# EAGLE board Task 5 - P2P Communication  (EAGLE 9.7.0)

Size 281.66 x 280.87 mm. Coordinates in mm from the lower left corner, seen from the top.
Outline: 0,0 281.66,0 281.66,280.87 0,280.87 0,0
Copper layers (1*16): Top 0.035mm / dielectric 1.5mm / Bottom 0.035mm
Design rules "default": minimum track width 6mil, minimum drill 0.35mm, track to track 6mil, track to pad 6mil, pad to pad 6mil, via to via 6mil, smd to smd 6mil, copper to edge 40mil, drill to drill 6mil, minimum pad ring 10mil, minimum via ring 8mil, stop-mask expansion 4mil, vias tented up to drill 0mil, thermal gap 10mil

## Footprints (pad centres in the part's own frame; a part is rotated, then mirrored left to right if it is on the bottom)
LEDRD254W60D565H860B = drill 0.981 pad 1.581: 1 -1.27,0; 2 1.27,0
LEDRD254W60D565H860B_G = drill 0.981 pad 1.581: 1 -1.27,0; 2 1.27,0
LEDRD254W60D565H860B_Y = drill 0.981 pad 1.581: 1 -1.27,0; 2 1.27,0
7SEG-13 = drill 0.813 long: 1 -5.08,-7.62; 2 -2.54,-7.62; 3 0,-7.62; 4 2.54,-7.62; 5 5.08,-7.62; 6 5.08,7.62; 7 2.54,7.62; 8 0,7.62; 9 -2.54,7.62; 10 -5.08,7.62
RESAD1016W63L850D250B = drill 0.83 pad 1.43: 1 -5.08,0; 2 5.08,0
SWITCH-MOMENTARY-PTH-6.5MM = drill 1.016 pad 1.88: 1 -3.251,2.261; 2 3.251,2.261; 3 -3.251,-2.261; 4 3.251,-2.261
ARDUINO-UNO-R3-SHIELD = drill 1.016 pad 1.88: 3.3V 24.13,-2.54; 5V 24.13,0; A0 24.13,12.7; A1 24.13,15.24; A2 24.13,17.78; A3 24.13,20.32; A4 24.13,22.86; A5 24.13,25.4; AREF -24.13,-13.97; D2 -24.13,20.32; D3 -24.13,17.78; D4 -24.13,15.24; D5 -24.13,12.7; D6 -24.13,10.16; D7 -24.13,7.62; D8 -24.13,3.81; D9 -24.13,1.27; D10 -24.13,-1.27; D11 -24.13,-3.81; D12 -24.13,-6.35; D13 -24.13,-8.89; GND@0 24.13,2.54; GND@1 24.13,5.08; GND@2 -24.13,-11.43; IOREF 24.13,-7.62; NC 24.13,-10.16; RES 24.13,-5.08; RX -24.13,25.4; SCL -24.13,-19.05; SDA -24.13,-16.51; TX -24.13,22.86; VIN 24.13,7.62

## Placement (x,y rotation side)
D1  RED  [LEDRD254W60D565H860B]  181.29,95.16 180 top
D2  GREEN  [LEDRD254W60D565H860B_G]  221.93,95.16 180 top
D3  YELLOW  [LEDRD254W60D565H860B_Y]  201.61,95.16 180 top
D4  GREEN  [LEDRD254W60D565H860B_G]  275.6,218.68 180 top
D5  RED  [LEDRD254W60D565H860B]  267.98,218.68 180 top
D6  GREEN  [LEDRD254W60D565H860B_G]  166.38,208.52 180 top
D7  YELLOW  [LEDRD254W60D565H860B_Y]  151.14,208.52 180 top
D8  RED  [LEDRD254W60D565H860B]  135.9,208.52 180 top
D9  RED  [LEDRD254W60D565H860B]  196.86,226.3 180 top
D10  YELLOW  [LEDRD254W60D565H860B_Y]  209.56,226.3 180 top
D11  GREEN  [LEDRD254W60D565H860B_G]  222.26,226.3 180 top
DIGIT1  7SEG-CK  [7SEG-13]  263.06,266.77 0 top
R1  1k  [RESAD1016W63L850D250B]  180.02,82.46 90 top
R2  1k  [RESAD1016W63L850D250B]  200.34,82.46 90 top
R3  1k  [RESAD1016W63L850D250B]  220.66,82.46 90 top
R4  1k  [RESAD1016W63L850D250B]  266.71,195.82 90 top
R5  1k  [RESAD1016W63L850D250B]  274.33,195.82 90 top
R6  1k  [RESAD1016W63L850D250B]  8.97,167.68 180 top
R7  1k  [RESAD1016W63L850D250B]  21,164.8 180 top
R8  1k  [RESAD1016W63L850D250B]  29.09,170.08 180 top
R9  1k  [RESAD1016W63L850D250B]  134.63,195.82 90 top
R10  1k  [RESAD1016W63L850D250B]  149.87,195.82 90 top
R11  1k  [RESAD1016W63L850D250B]  165.11,195.82 90 top
R12  1k  [RESAD1016W63L850D250B]  195.59,195.82 90 top
R13  1k  [RESAD1016W63L850D250B]  208.29,195.82 90 top
R14  1k  [RESAD1016W63L850D250B]  220.99,195.82 90 top
R15  1k  [RESAD1016W63L850D250B]  24.14,172.89 180 top
R16  1k  [RESAD1016W63L850D250B]  27.27,177.51 180 top
R17  1k  [RESAD1016W63L850D250B]  13.75,175.69 180 top
R19  1k  [RESAD1016W63L850D250B]  97.64,232.73 90 top
S1  SWITCH_MOMENTARY  [SWITCH-MOMENTARY-PTH-6.5MM]  254.01,222.49 90 top
UMASTER  ARDUINO-UNO-R3-SHIELD  [ARDUINO-UNO-R3-SHIELD]  60.77,190.63 180 top
USLAVE  ARDUINO-UNO-R3-SHIELD  [ARDUINO-UNO-R3-SHIELD]  105.98,34.52 180 top

## Library data of the parts
D1 D5 D8 D9 = Tinkercad; CATEGORY: Opto-Electronic; SUB-CATEGORY: LED; VALUE: LED_RED
D2 D4 D6 D11 = Tinkercad; CATEGORY: Opto-Electronic; SUB-CATEGORY: LED; VALUE: LED_GREEN
D3 D7 D10 = Tinkercad; CATEGORY: Opto-Electronic; SUB-CATEGORY: LED; VALUE: LED_YELLOW
DIGIT1 = Tinkercad; CATEGORY: Opto-Electronic; SUB-CATEGORY: Display; TYPE: 7-Segment
R1-R17 R19 S1 UMASTER USLAVE = Tinkercad

## Nets
D1_C: D1.2 R1.2
D2_C: D2.2 R3.2
D3_C: D3.2 R2.2
D4_C: D4.2 R5.2
D5_C: D5.2 R4.2
D6_C: D6.2 R11.2
D7_C: D7.2 R10.2
D8_C: D8.2 R9.2
D9_C: D9.2 R12.2
D10_C: D10.2 R13.2
D11_C: D11.2 R14.2
DIGIT1_A: DIGIT1.7 R19.2
DIGIT1_B: DIGIT1.6 R16.2
DIGIT1_C: DIGIT1.4 R17.2
DIGIT1_D: DIGIT1.2 R15.2
DIGIT1_E: DIGIT1.1 R8.2
DIGIT1_F: DIGIT1.9 R6.2
DIGIT1_G: DIGIT1.10 R7.2
UMASTER_A0: R16.1 UMASTER.A0
UMASTER_A1: R17.1 UMASTER.A1
UMASTER_A2: R15.1 UMASTER.A2
UMASTER_A3: R8.1 UMASTER.A3
UMASTER_A4: R6.1 UMASTER.A4
UMASTER_A5: R7.1 UMASTER.A5
UMASTER_D2: D6.1 UMASTER.D2
UMASTER_D3: D7.1 UMASTER.D3
UMASTER_D4: D8.1 UMASTER.D4
UMASTER_D5: D9.1 UMASTER.D5
UMASTER_D6: D10.1 UMASTER.D6
UMASTER_D7: D11.1 UMASTER.D7
UMASTER_D8: R19.1 UMASTER.D8
UMASTER_D9: D5.1 UMASTER.D9
UMASTER_D10: D4.1 UMASTER.D10
UMASTER_D11: S1.3 S1.4 UMASTER.D11
UMASTER_RX: UMASTER.RX USLAVE.TX
UMASTER_TX: UMASTER.TX USLAVE.RX
USLAVE_D2: D2.1 USLAVE.D2
USLAVE_D3: D3.1 USLAVE.D3
USLAVE_D4: D1.1 USLAVE.D4
USLAVE_GND: DIGIT1.3 DIGIT1.8 R1.1 R2.1 R3.1 R4.1 R5.1 R9.1 R10.1 R11.1 R12.1 R13.1 R14.1 S1.1 S1.2 UMASTER.GND@0 UMASTER.GND@1 UMASTER.GND@2 USLAVE.GND@0 USLAVE.GND@1 USLAVE.GND@2

## Tracks (layer width: path | path; a pad name or v marks a point on that pad's centre or on a via)
D1_C  (1 unrouted)
D2_C  (1 unrouted)
D3_C  (1 unrouted)
D4_C  (1 unrouted)
D5_C  (1 unrouted)
D6_C  (1 unrouted)
D7_C  (1 unrouted)
D8_C  (1 unrouted)
D9_C  (1 unrouted)
D10_C  (1 unrouted)
D11_C  (1 unrouted)
DIGIT1_A  (1 unrouted)
DIGIT1_B  (1 unrouted)
DIGIT1_C  (1 unrouted)
DIGIT1_D  (1 unrouted)
DIGIT1_E  (1 unrouted)
DIGIT1_F  (1 unrouted)
DIGIT1_G  (1 unrouted)
UMASTER_A0  (1 unrouted)
UMASTER_A1  (1 unrouted)
UMASTER_A2  (1 unrouted)
UMASTER_A3  (1 unrouted)
UMASTER_A4  (1 unrouted)
UMASTER_A5  (1 unrouted)
UMASTER_D2  (1 unrouted)
UMASTER_D3  (1 unrouted)
UMASTER_D4  (1 unrouted)
UMASTER_D5  (1 unrouted)
UMASTER_D6  (1 unrouted)
UMASTER_D7  (1 unrouted)
UMASTER_D8  (1 unrouted)
UMASTER_D9  (1 unrouted)
UMASTER_D10  (1 unrouted)
UMASTER_D11  (2 unrouted)
UMASTER_RX  (1 unrouted)
UMASTER_TX  (1 unrouted)
USLAVE_D2  (1 unrouted)
USLAVE_D3  (1 unrouted)
USLAVE_D4  (1 unrouted)
USLAVE_GND  (20 unrouted)